# Altium PCB PSAT.PcbDoc
Units mil, origin at the board's own origin, x right, y up, seen from the top; angles counter-clockwise.
Board outline 2204.72 x 2204.72 mil, 2 copper layers (Top Layer, Bottom Layer); 42 components, 38 nets, 171 pads, 0 vias.
Unrouted connection lines stored in the file: 116.
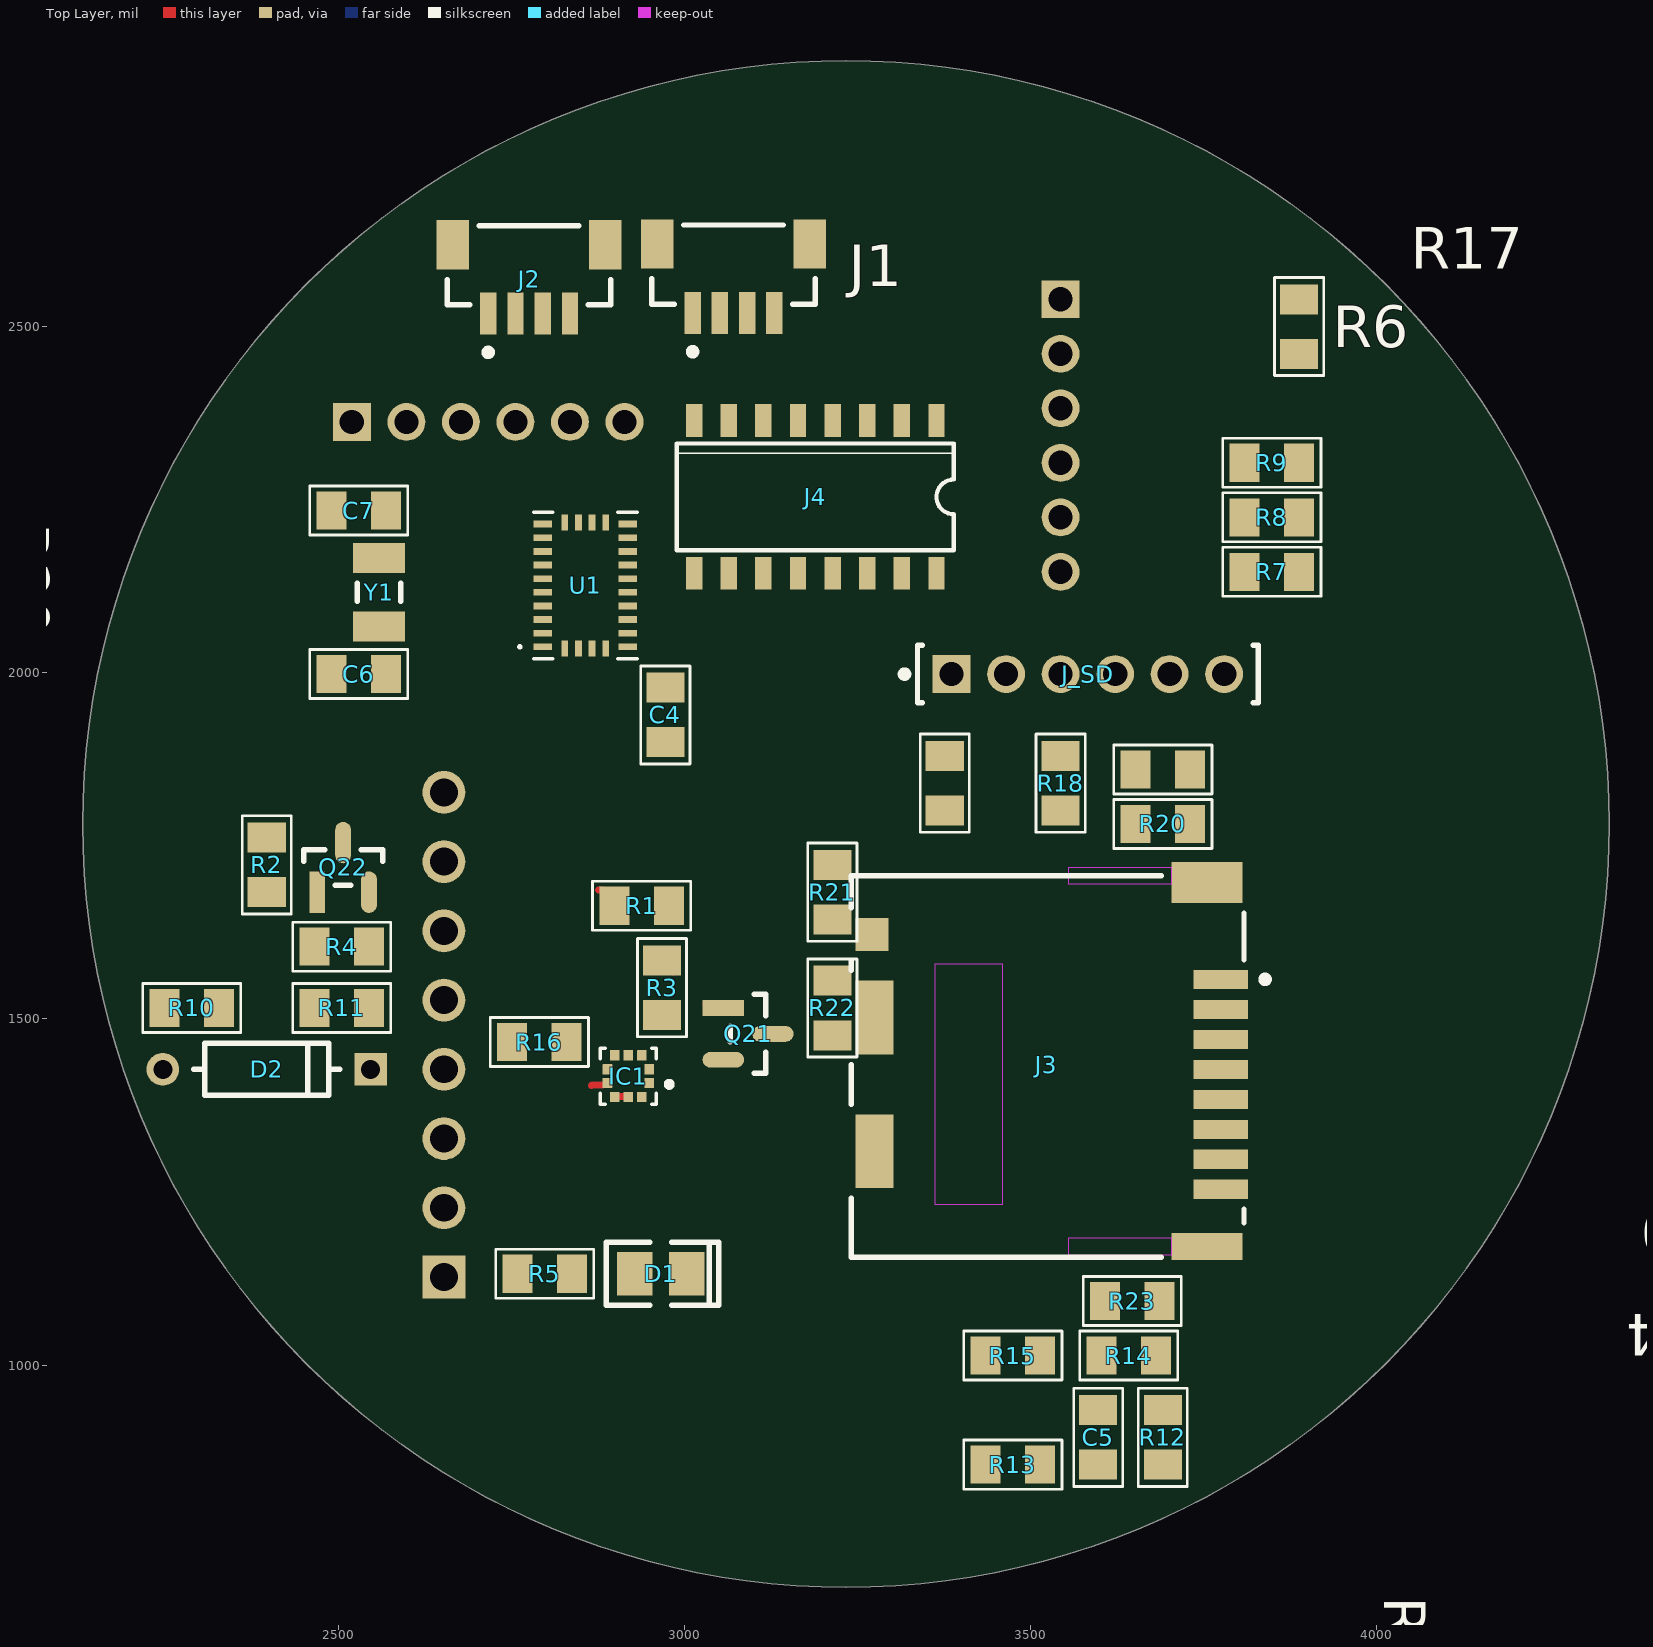
[diagram p0: Top Layer view]
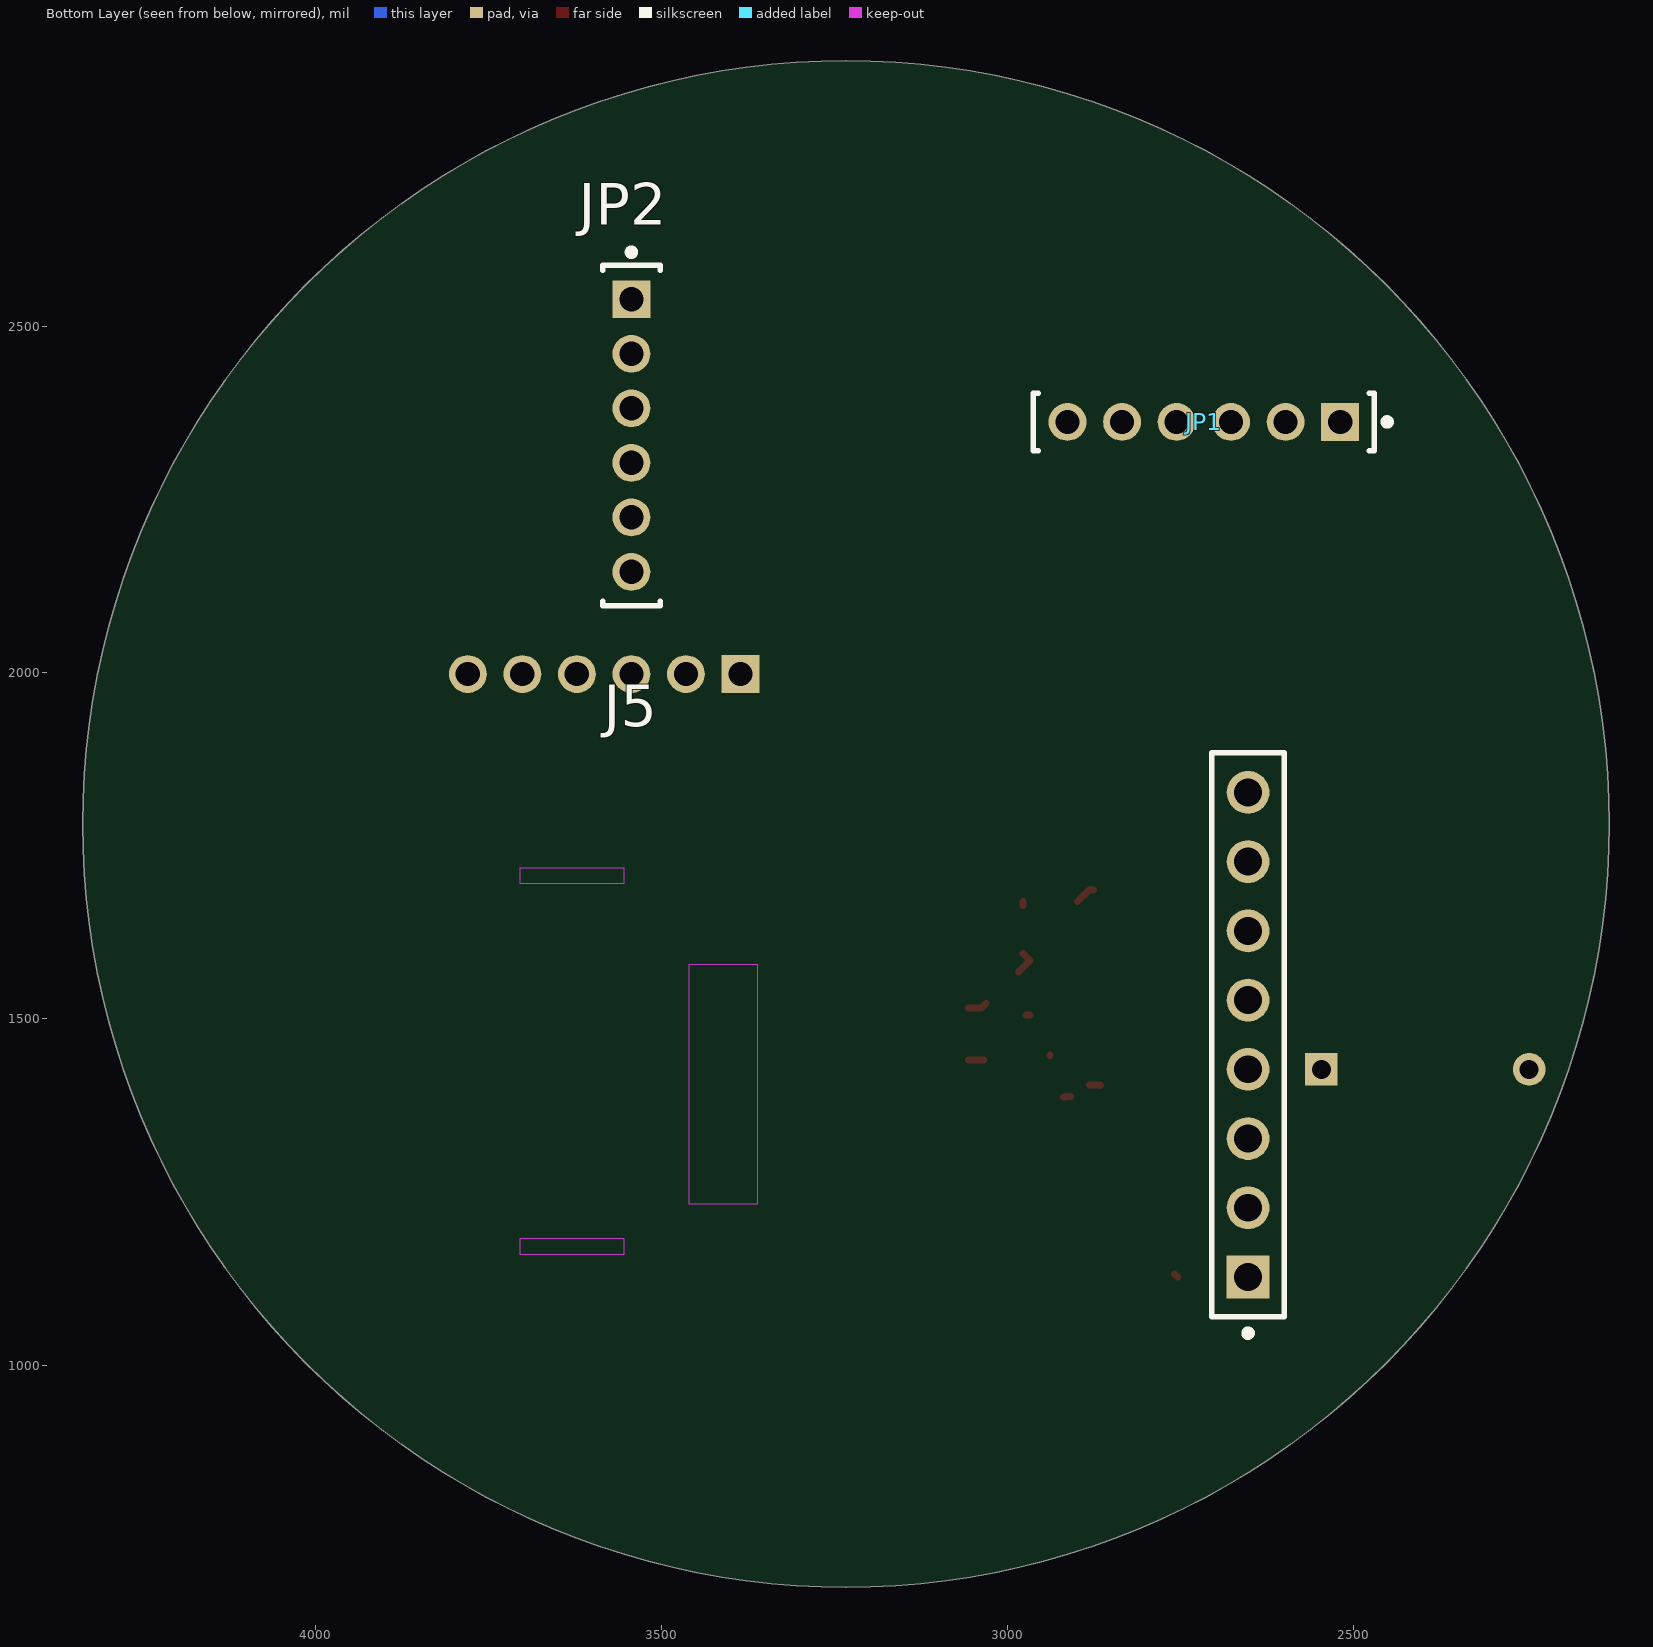
[diagram p1: Bottom Layer view, seen from below]

## Layer stack, top to bottom
Top Solder: solder mask 0.4, Solder Resist, Dk 3.5
Top Layer: signal copper 1.4
Dielectric 1: dielectric 12.6, FR-4, Dk 4.8
Bottom Layer: signal copper 1.4
Bottom Solder: solder mask 0.4, Solder Resist, Dk 3.5

## Board outline
3233.35,679.13 cw(c3233.35,1781.5) 2130.98,1781.5 cw(c3233.35,1781.5) 3233.35,2883.86 cw(c3233.35,1781.5) 4335.71,1781.5 cw(c3233.35,1781.5)

## Design rules (kind name [scope] priority, off if disabled: settings)
Clearance [All] p1: gap=6 ignorepadtopadclearanceinfootprint=FALSE
PolygonConnect [All] p1: connectstyle=Relief reliefconductorwidth=10 reliefentries=4 polygonreliefangle="90 Angle" airgapwidth=10
RoutingVias [All] p1: holewidth=9.84 width=31.5 viastyle="Through Hole" minholewidth=9.84 minwidth=31.5 maxholewidth=11.81 maxwidth=37.4
SolderMaskExpansion [All] p1: expansion=3.15 istentingtop=FALSE
SupplyNets "Schematic Supply Nets_31" [InNet('MISO_3V')] p1: voltage=0.000
SupplyNets "Schematic Supply Nets_37" [InNet('MT')] p2: voltage=0.000
SupplyNets "Schematic Supply Nets_36" [InNet('IMU_PS1')] p3: voltage=0.000
SupplyNets "Schematic Supply Nets_35" [InNet('SDA/MISO/TX')] p4: voltage=0.000
SupplyNets "Schematic Supply Nets_34" [InNet('IMU_CS')] p5: voltage=0.000
SupplyNets "Schematic Supply Nets_33" [InNet('BARO_CS')] p6: voltage=0.000
SupplyNets "Schematic Supply Nets_32" [InNet('IMU_PS0')] p7: voltage=0.000
SupplyNets "Schematic Supply Nets_28" [InNet('IMU_PS1_3V')] p8: voltage=0.000
SupplyNets "Schematic Supply Nets_27" [InNet('IMU_RST')] p9: voltage=0.000
SupplyNets "Schematic Supply Nets_26" [InNet('MOSI_3V')] p10: voltage=0.000
SupplyNets "Schematic Supply Nets_24" [InNet('MOSI')] p11: voltage=0.000
SupplyNets "Schematic Supply Nets_23" [InNet('IMU_INT')] p12: voltage=0.000
SupplyNets "Schematic Supply Nets_22" [InNet('IMU_CS_3V')] p13: voltage=0.000
SupplyNets "Schematic Supply Nets_21" [InNet('IMU_BOOT_3V')] p14: voltage=0.000
SupplyNets "Schematic Supply Nets_20" [InNet('XOUT')] p15: voltage=0.000
SupplyNets "Schematic Supply Nets_19" [InNet('SDI/SDA')] p16: voltage=0.000
SupplyNets "Schematic Supply Nets_18" [InNet('3.3V')] p17: voltage=0.000
SupplyNets "Schematic Supply Nets_17" [InNet('IMU_RST_3V')] p18: voltage=0.000
SupplyNets "Schematic Supply Nets_16" [InNet('SD_CS')] p19: voltage=0.000
SupplyNets "Schematic Supply Nets_15" [InNet('SDI_3V')] p20: voltage=0.000
SupplyNets "Schematic Supply Nets_14" [InNet('IMU_PS0_3V')] p21: voltage=0.000
SupplyNets "Schematic Supply Nets_13" [InNet('GND')] p22: voltage=0.000
SupplyNets "Schematic Supply Nets_11" [InNet('IMU_BOOT')] p23: voltage=0.000
SupplyNets "Schematic Supply Nets_10" [InNet('SCL/SCK/RX')] p24: voltage=0.000
SupplyNets "Schematic Supply Nets_8" [InNet('SCK/SCL')] p25: voltage=0.000
SupplyNets "Schematic Supply Nets_7" [InNet('BARO_INT')] p26: voltage=0.000
SupplyNets "Schematic Supply Nets_6" [InNet('SDO/ADR')] p27: voltage=0.000
SupplyNets "Schematic Supply Nets_2" [InNet('SCK_3V')] p28: voltage=0.000
SupplyNets "Schematic Supply Nets" [InNet('XIN')] p29: voltage=0.000
Width [All] p1: maxlimit=20 minlimit=6 preferedwidth=10
30 further rules are at their usual default settings.

## Components (designator, comment, footprint, x,y, rotation, side; value= is the part's Value field where it differs from the comment)
C4 "0.1uF" "0805 CAP" 2972.44,1938.98 r270 top
C5 "0.1uF" "0805 CAP" 3597.52,895.67 r90 top
C6 "22pF" "0805 CAP" 2529.53,1998.03 r180 top
C7 "22pF" "0805 CAP" 2529.53,2234.25 r180 top
D1 "*" ECE-LED2012-0805SM 2965.63,1131.89 r0 top
D2 "1N4148" FP-017AG-MFG 2396.73,1427.17 r180 top
IC1 "BMP388" PQFN50P200X200X80-10N 2918.98,1417.32 r180 top
J1 "BM04B-SRSS-TBT(LF)(SN)" FP-BM04B-SRSS-TBT_LF_SN-MFG 3070.87,2589.57 r0 top
J2 "BM04B-SRSS-TBT(LF)(SN)" FP-BM04B-SRSS-TBT_LF_SN-MFG 2775.59,2588.58 r0 top
J3 "DM3CS-SF" FP-DM3CS-SF-MFG 3524.69,1431.1 r90 top
J4 "74HC4050D" *SO16 3188.98,2253.94 r180 top
J5 "TSW-108-08-G-S" FP-TSW-108-08-G-S-MFG 2652.64,1477.17 r90 bottom
J_SD "TMM-106-01-T-S" FP-TMM-106-01-T-S-MFG 3582.68,1998.03 r0 top
JP1 "TMM-106-01-T-S" FP-TMM-106-01-T-S-MFG 2716.54,2362.2 r0 bottom
JP2 "TMM-106-01-T-S" FP-TMM-106-01-T-S-MFG 3543.31,2342.52 r270 bottom
Q21 "BSS138" FP-318-08-IPC_B 3092.02,1478.35 r0 top
Q22 "BSS138" FP-318-08-IPC_B 2506.97,1718.9 r90 top
R1 "Resistor" "0805 RES" 2938.07,1663.39 r0 top value=10K
R2 "Resistor" "0805 RES" 2396.73,1722.44 r270 top value=1K
R3 "Resistor" "0805 RES" 2967.6,1545.28 r90 top value=10K
R4 "Resistor" "0805 RES" 2505,1604.33 r180 top value=10K
R5 "Resistor" "0805 RES" 2798.31,1131.89 r180 top value=10K
R6 "Resistor" "0805 RES" 3887.8,2500 r90 top value=10K
R7 "Resistor" "0805 RES" 3848.43,2145.67 r0 top value=10K
R8 "Resistor" "0805 RES" 3848.43,2224.41 r0 top value=10K
R9 "Resistor" "0805 RES" 3848.43,2303.15 r0 top value=10K
R10 "Resistor" "0805 RES" 2288.46,1515.75 r0 top value=10K
R11 "Resistor" "0805 RES" 2505,1515.75 r180 top value=10K
R12 "Resistor" "0805 RES" 3690.94,895.67 r90 top value=0
R13 "Resistor" "0805 RES" 3474.41,856.3 r180 top value=0
R14 "Resistor" "0805 RES" 3641.73,1013.78 r180 top value=10K
R15 "Resistor" "0805 RES" 3474.41,1013.78 r0 top value=10K
R16 "Resistor" "0805 RES" 2790.43,1466.54 r180 top value=0
R17 "Resistor" "0805 RES" 3690.94,1860.24 r180 top value=1K
R18 "Resistor" "0805 RES" 3543.31,1840.55 r90 top value=1K
R19 "1K" "0805 RES" 3375.98,1840.55 r90 top
R20 "Resistor" "0805 RES" 3690.94,1781.5 r0 top value=2.2K
R21 "Resistor" "0805 RES" 3213.66,1683.07 r270 top value=2.2K
R22 "Resistor" "0805 RES" 3213.66,1515.75 r270 top value=2.2K
R23 "Resistor" "0805 RES" 3646.73,1092.52 r180 top value=10K
U1 "BNO085" IC_BNO085 2856.79,2125.98 r90 top
Y1 "ABS07-32.768KHZ-T" FP-ABS07-MFG 2559.06,2116.14 r90 top

## Footprints (in the part's own frame and the unit in brackets; to place one, negate y for a bottom-side part, rotate by r counter-clockwise, add the part's x,y. Pads: shape width x height; smd on the part's side, far side on the other; paste and mask are expansions set on the pad)
"0805 CAP" [mm] "http://www.digikey.co.nz/Web%20Export/Supplier%20Content/Vishay_8026/PDF/VishayBeyschlag_SolderPad.pdf?redirected=1 with dimension G modified by +0.25mm"
  rect 1.1x1.4 smd: 1(-1,0) 2(1,0)
  silkscreen extent -1.8,-0.9 1.8,0.9, body extent -1.04,-0.66 1.04,0.66, height 0.61
"0805 RES" [mm] "http://www.digikey.co.nz/Web%20Export/Supplier%20Content/Vishay_8026/PDF/VishayBeyschlag_SolderPad.pdf?redirected=1 with dimension G modified by +0.25mm"
  rect 1.1x1.4 smd: 1(-1,0) 2(1,0)
  silkscreen extent -1.8,-0.9 1.8,0.9, body extent -1.04,-0.66 1.04,0.66, height 0.61
*SO16 [mm]
  rect 0.6x1.2 smd: 1(-4.445,-2.8) 2(-3.175,-2.8) 3(-1.905,-2.8) 4(-0.635,-2.8) 5(0.635,-2.8) 6(1.905,-2.8) 7(3.175,-2.8) 8(4.445,-2.8) 9(4.445,2.8) 10(3.175,2.8) 11(1.905,2.8) 12(0.635,2.8) 13(-0.635,2.8) 14(-1.905,2.8) 15(-3.175,2.8) 16(-4.445,2.8)
  silkscreen extent -5.08,-1.96 5.08,1.96
ECE-LED2012-0805SM [mm] "SMD LED, Body; 2mm x 1.25 mm (LxW)"
  rect 1.3x1.6 smd: 1(-0.95,0) 2(0.95,0)
  silkscreen extent -2,-1.15 2.13,1.15
FP-017AG-MFG [mm]
  rect 1.2x1.2 hole 0.7 paste-2539.97 mask+0: 1(-3.813,0)
  round 1.2 hole 0.7 paste-2539.97 mask+0: 2(3.813,0)
  silkscreen extent -2.68,-0.95 2.68,0.95, body extent -4.51,-1.05 4.51,1.05, height 0.25
FP-318-08-IPC_B [mm]
  rect 1.524x0.578 smd paste+0 mask+0: 1(-0.91,0.95)
  rrect100% 1.524x0.578 smd paste+0 mask+0: 2(-0.91,-0.95) 3(0.91,0)
  silkscreen extent -0.65,-1.45 0.65,1.45, body extent -1.92,-1.7 1.92,1.7, height 0.25
FP-ABS07-MFG [mm]
  rect 1.1x1.9 smd paste+0 mask+0: 1(-1.25,0) 2(1.25,0)
  silkscreen extent -0.33,-0.8 0.33,0.8, body extent -1.9,-1.05 1.9,1.05, height 0.25
FP-BM04B-SRSS-TBT_LF_SN-MFG [mm]
  rect 0.6x1.55 smd paste+0 mask+0: 1(-1.5,-1.775) 2(-0.5,-1.775) 3(0.5,-1.775) 4(1.5,-1.775)
  rect 1.2x1.8 smd paste+0 mask+0: 5(-2.8,0.75) 6(2.8,0.75)
  silkscreen extent -3,-3.32 3,1.45, body extent -3,-2.15 3,1.45, height 4.33
FP-DM3CS-SF-MFG [mm]
  rect 0.7x2 smd paste+0 mask+0: 1(3.2,-6.35) 2(2.1,-6.35) 3(1,-6.35) 4(-0.1,-6.35) 5(-1.2,-6.35) 6(-2.3,-6.35) 7(-3.4,-6.35) 8(-4.5,-6.35)
  rect 2.7x1.4 smd paste+0 mask+0: 9(-3.1,6.35) 10(1.8,6.35)
  rect 1.2x1.2 smd paste+0 mask+0: 11(4.85,6.45)
  rect 1x2.6 smd paste+0 mask+0: 12(-6.6,-5.85)
  rect 1.5x2.6 smd paste+0 mask+0: 13(6.75,-5.85)
  Keep-Out Layer region: -5.05,1.65 3.75,1.65 3.75,4.15 -5.05,4.15
  Keep-Out Layer region: 6.7,-4.55 7.3,-4.55 7.3,-0.75 6.7,-0.75
  Keep-Out Layer region: -6.901,-4.55 -6.301,-4.55 -6.301,-0.75 -6.901,-0.75
  silkscreen extent -7,-8.1 7,7.2, body extent -6.9,-7.05 6.9,7.05, height 2.13
FP-TMM-106-01-T-S-MFG [mm]
  rect 1.39x1.39 hole 0.89 paste-2539.97 mask+0: 1(-5,0)
  round 1.39 hole 0.89 paste-2539.97 mask+0: 2(-3,0) 3(-1,0) 4(1,0) 5(3,0) 6(5,0)
  silkscreen extent -6.85,-1.05 6.25,1.05, body extent -6,-1 6,0.99, height 4.88
FP-TSW-108-08-G-S-MFG [mm]
  rect 1.57x1.57 hole 1.02 paste-2539.97 mask+0: 1(-8.89,0)
  round 1.57 hole 1.02 paste-2539.97 mask+0: 2(-6.35,0) 3(-3.81,0) 4(-1.27,0) 5(1.27,0) 6(3.81,0) 7(6.35,0) 8(8.89,0)
  silkscreen extent -11.07,-1.34 10.35,1.34, body extent -10.29,-1.27 10.16,1.27, height 8.71
IC_BNO085 [mm]
  rect 0.25x0.675 smd: 1(-2.25,1.562) 6(-2.25,-1.562) 7(-1.75,-1.562) 8(-1.25,-1.562) 9(-0.75,-1.562) 10(-0.25,-1.562) 11(0.25,-1.562) 12(0.75,-1.562) 13(1.25,-1.562) 14(1.75,-1.562) 15(2.25,-1.562) 20(2.25,1.562) 21(1.75,1.562) 22(1.25,1.562) 23(0.75,1.562) 24(0.25,1.562) 25(-0.25,1.562) 26(-0.75,1.562) 27(-1.25,1.562) 28(-1.75,1.562)
  rect 0.575x0.25 smd: 2(-2.312,0.75) 3(-2.312,0.25) 4(-2.312,-0.25) 5(-2.312,-0.75) 16(2.312,-0.75) 17(2.312,-0.25) 18(2.312,0.25) 19(2.312,0.75)
  silkscreen extent -2.69,-1.9 2.69,2.45, body extent -2.6,-1.9 2.6,1.9, height 1.18
PQFN50P200X200X80-10N [mm]
  rrect9% 0.35x0.38 smd: 1(-0.765,0.25) 2(-0.765,-0.25) 3(-0.5,-0.765) 4(0,-0.765) 5(0.5,-0.765) 6(0.765,-0.25) 7(0.765,0.25) 8(0.5,0.765) 9(0,0.765) 10(-0.5,0.765)
  silkscreen extent -1.6,-1.03 1.03,1.03

## Part data
C4 C5 C6 C7: library part CerCap_SMT_0805, "SMT ceramic capacitor 0805 size"
D1: library part LED-SM0805, "SMT LED", Manufacturer="Generic Components", Class I=Optoelectronic, Class II=LED, Published=8-Jun-2000, Publisher="Altium Limited", Revision="July-2002: Re-released for DXP Platform."
D2: library part CMP-07163-000046-1, "DIODE GEN PURP 100V 200MA DO35", Average Rectified Current=200mA, Capacitance=4pF, Case/Package=DO-35, Current=4A, Forward Current=300mA, Forward Voltage=1V, Max Forward Surge Current (Ifsm)=1A, Max Operating Temperature=175°C, Max Power Dissipation=500mW, Max Repetitive Reverse Voltage (Vrrm)=100V, Max Reverse Current=5uA, Min Operating Temperature=-65°C, Package Quantity=2000, Contact Plating=Tin, Current Rating=200mA, Diameter=1.91mm, Element Configuration=Single, Height=4.56mm, Lead Free="Lead Free", Length=4.56mm, Max Reverse Voltage (DC)=100V, Max Surge Current=4A, Mount="Through Hole", Number of Pins=2, Output Current=200mA, Outside Diameter=1.85mm, Packaging=Bulk, Peak Non-Repetitive Surge Current=4A, Polarity=Standard, Power Dissipation=500mW, Radiation Hardening=No, REACH SVHC="No SVHC", Recovery Time=4ns, Reverse Recovery Time=4ns, Reverse Voltage=100V, Series=-, Voltage=100V, Voltage Rating (DC)=100V, Weight=0.01lb, Width=1.91mm
IC1: "P-Sensor SPI I2C 1, 25 Bar SMD", Package=None, Availability=Unavailable, MP=BMP388, Price=None
J1 J2: library part CMP-17439-000370-1, "CONN HEADER SMD 4POS 1MM", Color=Natural, Flammability Rating="UL94 V-0", Package Quantity=1, Voltage Rating=50V, Connector Type=Header, Contact Finish - Mating=TIN, Contact Material="Copper Alloy", Contact Plating=Tin, Contact Shape=Square, Contact Type="Male Pin", Fastening Type=Pull, Insulation Color=Natural, Insulation Material=Nylon, Lead Free="Lead Free", Mated Stacking Heights=4.9mm, Mount="Surface Mount", Number of Positions=4, Number of Rows=1, Packaging="Cut Tape", Pitch=0.039inch, Series=SR, Termination=Solder
J3: library part CMP-11597-000003-1, "CONN MICRO SD CARD HINGED TYPE", Contact Resistance=100mR, Current Rating=500mA, Flammability Rating="UL94 V-0", Insulation Resistance=1GR, Max Operating Temperature=85°C, Min Operating Temperature=-25°C, Package Quantity=1, Voltage Rating (AC)=125V, Connector Type=Connector, Contact Material=Gold, Contact Plating=Gold, Depth=1.83mm, Gender=Female, Housing Material=Polymer, Lead Free="Lead Free", Length=14.1mm, Max Current Rating=500mA, Mount="Surface Mount", Number of Contacts=8, Number of Positions=8, Number of Rows=1, Orientation="Right Angle", Packaging="Tape and Reel", Pitch=1.1mm, Radiation Hardening=No, Termination=Solder, Width=13.8mm
J5: library part CMP-02766-000001-1, "CONN HEADER VERT 8POS 2.54MM", Manufacturer=Samtec, Temperature="-55°C to +125°C", Temperature Range High=+125°C, Temperature Range Low=-55°C, Automotive=No, Category=Conn, ComponentLink2Description=Datasheet, ComponentLink2URL=http://suddendocs.samtec.com/catalog_english/tsw_th.pdf, Conn Gender=Male, Conn Orientation=Straight, Contact Material=Gold,Nickel, Device Class L1=Connectors, Device Class L2="Headers and Wire Housings", Device Class L3=unset, Digikey Description="CONN HEADER VERT 8POS 2.54MM", Footprint Url=http://suddendocs.samtec.com/prints/tsw-xxx-xx-x-x-xx-xxx-footprint.pdf, Height=8.71mm, Lead Free=Yes, Manufacturer Part Number=TSW-108-08-G-S, Mouser Description="TSW - Samtec 2.54mm Pin Header 13.46mm Overall Pin Length 5.08mm Tail", Number of Contacts=8, Number of Rows=1, Octopart=https://octopart.com/tsw-108-08-g-s-samtec-272653, Package=TSW-108-08-G-S, Pitch=2.54mm, RoHS=TRUE
J_SD JP1 JP2: library part CMP-02766-001694-1, "CONN HEADER VERT 6POS 2MM", Color=Black, Max Operating Temperature=105°C, Max Voltage Rating (AC)=500V, Min Operating Temperature=-55°C, Connector Type="Male Pin", Contact Material=Bronze, Contact Mating Length=0.126inch, Contact Plating=Tin, Contact Type="Male Pin", Depth=1.97mm, Gender=Male, Housing Color=Black, Housing Material=Polymer, Lead Free="Lead Free", Length=12mm, Mount="Through Hole", Number of Contacts=6, Number of Positions=6, Number of Rows=1, Orientation=Straight, Packaging=Bulk, Pitch=2mm, Radiation Hardening=No, REACH SVHC="No SVHC", RoHS Compliant=Yes, Series="FleXYZ™ TMM", Termination=Solder, Width=1.97mm
Q21 Q22: library part CMP-07173-000101-1, "MOSFET N-CH 50V 220MA SOT-23", Case/Package=SOT-23, Continuous Drain Current (ID)=220mA, Drain to Source Breakdown Voltage=50V, Drain to Source Resistance=3.5R, Gate to Source Voltage (Vgs)=20V, Input Capacitance=27pF, Max Operating Temperature=150°C, Max Power Dissipation=360mW, Min Operating Temperature=-55°C, On-State Resistance=6R, Package Quantity=1, Threshold Voltage=1.3V, Contact Plating=Tin, Current Rating=220mA, Drain to Source Voltage (Vdss)=50V, Dual Supply Voltage=50V, Element Configuration=Single, Fall Time=9ns, Height=0.93mm, Lead Free="Lead Free", Length=2.92mm, Mount="Surface Mount", Nominal Vgs=1.3V, Number of Elements=1, Number of Pins=3, Packaging="Tape and Reel", Power Dissipation=360mW, Radiation Hardening=No, Rds On Max=3.5R, REACH SVHC="No SVHC", Rise Time=9ns, Termination=SMD/SMT, Turn-Off Delay Time=20ns, Turn-On Delay Time=2.5ns, Voltage Rating (DC)=50V, Weight=0.03g, Width=1.3mm
R19: library part Res_SMT_0805, "0805 resistor", ComponentLink1Description=https://nz.mouser.com/datasheet/2/315/AOA0000C304-1149620.pdf, LatestRevisionDate=17-Jul-2002, LatestRevisionNote="Re-released for DXP Platform.", PackageReference=AXIAL-0.4, Published=8-Jun-2000, Publisher="Altium Limited"
U1: "Accelerometer, Gyroscope, Magnetometer, 9 Axis Sensor IÂ²C, SPI, UART Output", Package="TFLGA-28 Hillcrest Laboratories", Check_prices=https://www.snapeda.com/parts/BNO085/Hillcrest+Laboratories%252C+Inc./view-part/?ref=eda, MF="Hillcrest Laboratories,", MP=BNO085, SnapEDA_Link=https://www.snapeda.com/parts/BNO085/Hillcrest+Laboratories%252C+Inc./view-part/?ref=snap
Y1: library part CMP-0447-00001-4, "Crystal 32.768kHz ±20ppm (Tol) 12.5pF FUND 70kΩ 2-Pin CSMD T/R", Case/Package=CSMD, ESR (Equivalent Series Resistance)=70kR, Frequency=32.768kHz, Frequency Tolerance=20ppm, Load Capacitance=12.5pF, Max Operating Temperature=85°C, Min Operating Temperature=-40°C, Operating Frequency="32.768 kHz", Package Quantity=3000, Depth=1.5mm, Height=0.9mm, Lead Free="Lead Free", Length=3.2mm, Number of Pins=2, Packaging="Tape and Reel", Radiation Hardening=No, REACH SVHC="No SVHC", RoHS Compliant=Yes, Series=ABS07, Series Resistance=70kR, Termination=SMD/SMT, Tolerance=20ppm, Width=1.5mm
J4: Check_prices=https://www.snapeda.com/parts/74HC4050D/Toshiba/view-part/?ref=eda, SnapEDA_Link=https://www.snapeda.com/parts/74HC4050D/Toshiba/view-part/?ref=snap
R1 R2 R3 R4 R5 R6 R7 R8 R9 R10 R11 R12 R13 R14 R15 R16 R17 R18 R20 R21 R22 R23: SimulationGenericComponent=True, TC1=0, TC2=0

## Nets (pads, with @x,y where several pads share a name; then routed paths per layer and width w, separated by ;. In a path a pad name is that pad's centre, name@x,y a point inside that pad or via, vN(x,y) a via of type N, cw(c..) or ccw(c..) an arc to the next point about the centre after c; other vN are vias at no path point)
3.3V: C5.1 IC1.1 IC1.10 J1.2 J2.2 J3.4 J4.1 J5.1 J5.8 J_SD.4 JP1.1 JP1.2 Q21.1 Q22.1 R1.2 R2.2 R3.2 R4.2 R5.2 R6.1 R7.2 R9.2 R10.2 R11.2 R12.1 R13.1 U1.3 U1.28 | length 77.7
  Top Layer w10: R5.2@2754.21,1127.17 R5.2 ; R3.2@2977.44,1594.49 R3.2 R3.2@2984.25,1567.99 ; R1.2 R1.2@2977.44,1669.29 ; Q21.1@3031.18,1522.13 3037.55,1515.75 Q21.1
BARO_CS: D2.1 IC1.6 J5.3
BARO_INT: IC1.7 J5.2 | length 15.9
  Top Layer w10: 2865.95,1403.98 2866.66,1404.68 2881.55,1404.68
GND: C4.2 C5.2 C6.2 C7.2 D1.2 IC1.3 IC1.8 IC1.9 J1.1 J2.1 J3.6 J3.9 J3.11 J3.12 J3.13 J4.8 J5.6 JP1.3 R8.2 R14.2 R15.2 R20.1 R21.1 R22.1 R23.1 R23.2 U1.2 U1.10 U1.25 | length 11.3
  Top Layer w10: 2908.54,1387.8 2916.18,1387.8 2916.77,1387.2 IC1.9 ; IC1.3 IC1.3@2938.66,1448.03
IMU_BOOT: J4.7 JP2.1 R6.2
IMU_BOOT_3V: J4.6 U1.4
IMU_CS: J4.9 JP2.6 R7.1
IMU_CS_3V: J4.10 U1.18
IMU_INT: JP1.6 U1.14
IMU_PS0: J4.3 JP2.3
IMU_PS0_3V: J4.2 U1.6
IMU_PS1: J4.5 JP2.2
IMU_PS1_3V: J4.4 U1.5
IMU_RST: J4.14 JP2.4 R9.1
IMU_RST_3V: J4.15 U1.11
MISO_3V: J3.7 J_SD.6
MOSI: J4.11 JP2.5 R8.1
MOSI_3V: J4.12 J_SD.3 R18.2 U1.17
MT: J1.5 J1.6 J2.5 J2.6
NetC4_1: C4.1 U1.9
NetD1_1: D1.1 R5.1
NetD2_2: D2.2 R10.1
NetIC1_5: IC1.5 R16.1
NetJ3_2: J3.2 R19.1 R22.2
NetJ3_3: J3.3 R18.1 R21.2
NetJ3_5: J3.5 R17.1 R20.2
NetR12_2: R12.2 R14.1
NetR13_2: R13.2 R15.1
SCK/SCL: J5.7 Q21.3 R1.1 | length 29.5
  Top Layer w10: 2876.14,1685.94 2882.05,1685.94 R1.1@2898.7,1669.29
SCK_3V: IC1.2 J_SD.5 Q21.2 R3.1 R17.2 | length 45.7
  Top Layer w10: R3.1 R3.1@2973.5,1505.91 ; Q21.2@3034.1,1440.94 Q21.2 Q21.2@3038.46,1440.94
SCL/SCK/RX: J1.4 J2.4 JP1.5 U1.19
SD_CS: J_SD.1 J_SD.2 R19.2
SDA/MISO/TX: J1.3 J2.3 JP1.4 U1.20
SDI/SDA: Q22.3 R2.1
SDI_3V: IC1.4 J5.5 Q22.2 R4.1
SDO/ADR: J5.4 R11.1 R16.2
XIN: C6.1 U1.27 Y1.1
XOUT: C7.1 U1.26 Y1.2
pads on no net: J3.1 J3.8 J3.10 J4.13 J4.16 U1.1 U1.7 U1.8 U1.12 U1.13 U1.15 U1.16 U1.21 U1.22 U1.23 U1.24

## Silkscreen, mask and mechanical layers (free items; w line width, h text height)
Mechanical 1:
  circle w10: c3233.35,1781.5 r1102.36
  lines w10: 625.08,97.48 ccw(c675.08,97.48) 675.08,47.48 6805.08,47.48 6805.08,2902.48 ccw(c6755.08,2902.48) 6755.08,2952.48 625.08,2952.48 625.08,97.48